# EAGLE board board with button (1) (EAGLE 8.2.2)

Size 29.19 x 33.96 mm. Coordinates in mm from the lower left corner, seen from the top.
Outline: 0,0 29.19,0 29.19,33.96 0,33.96 0,0
Copper layers (1*16): Top 0.035mm / dielectric 1.5mm / Bottom 0.035mm
Design rules "default": minimum track width 10mil, minimum drill 24mil, track to track 8mil, track to pad 8mil, pad to pad 8mil, via to via 8mil, smd to smd 8mil, copper to edge 40mil, drill to drill 8mil, minimum pad ring 10mil, minimum via ring 8mil, stop-mask expansion 4mil, vias tented up to drill 0mil, thermal gap 10mil

## Footprints (pad centres in the part's own frame; a part is rotated, then mirrored left to right if it is on the bottom)
C1206FAB = smd 1.27 x 1.905: 1 -1.651,0; 2 1.651,0
SOIC14 = smd 0.61 x 2.21: 1 -3.81,-2.603; 2 -2.54,-2.603; 3 -1.27,-2.603; 4 0,-2.603; 5 1.27,-2.603; 6 2.54,-2.603; 7 3.81,-2.603; 8 3.81,2.603; 9 2.54,2.603; 10 1.27,2.603; 11 0,2.603; 12 -1.27,2.603; 13 -2.54,2.603; 14 -3.81,2.603
LED1206FAB = smd 1.27 x 1.905: 1 -1.651,0; 2 1.651,0
R1206FAB = smd 1.27 x 1.905: 1 -1.651,0; 2 1.651,0
6MM_SWITCH = smd 2.286 x 1.524: 1 -3.302,2.286; 2 3.302,2.286; 3 -3.302,-2.286; 4 3.302,-2.286
EFOBM = smd 0.8 x 3.9: 1 -1.35,0; 2 0,0; 3 1.35,0
2X03SMD = smd 2.54 x 1.27: 1 -2.54,2.54; 2 2.92,2.54; 3 -2.54,0; 4 2.92,0; 5 -2.54,-2.54; 6 2.92,-2.54
1X06SMD = smd 2.54 x 1.27: 1 0,6.35; 2 0,3.81; 3 0,1.27; 4 0,-1.27; 5 0,-3.81; 6 0,-6.35

## Placement (x,y rotation side)
C1  1 uf  [C1206FAB]  15.24,30.48 0 top
IC1  ATTINY44-SSU  [SOIC14]  12.7,21.59 270 top
LED1  LEDFAB1206  [LED1206FAB]  3.81,11.43 0 top
R1  10k  [R1206FAB]  10.16,30.48 180 top
R2  498  [R1206FAB]  3.81,17.78 0 top
S1  [6MM_SWITCH]  22.86,12.7 0 top
U$1  RESONATOR  [EFOBM]  3.81,24.13 270 top
U$2  AVRISPSMD  [2X03SMD]  12.7,11.43 270 top
U$3  FTDI-SMD-HEADER  [1X06SMD]  26.67,24.13 0 top

## Library data of the parts
C1 IC1 LED1 R1 R2 S1 U$1-U$3 = fab

## Nets
BUTTON: IC1.10 S1.1
CTS: U$3.2
GND: C1.2 IC1.14 LED1.2 S1.3 U$1.2 U$2.6 U$3.1
LED: IC1.6 R2.2
MISO: IC1.8 U$2.1
MOSI: IC1.7 U$2.4
N$1: IC1.2 U$1.1
N$2: LED1.1 R2.1
N$4: IC1.3 U$1.3
RST: IC1.4 R1.1 U$2.5
RTS: U$3.6
RX: IC1.12 U$3.5
SCK: IC1.9 U$2.3
TX: IC1.13 U$3.4
VCC: C1.1 IC1.1 R1.2 U$2.2 U$3.3

## Tracks (layer width: path | path; a pad name or v marks a point on that pad's centre or on a via)
BUTTON  (1 unrouted)
GND  (6 unrouted)
LED  (1 unrouted)
MISO  (1 unrouted)
MOSI  (1 unrouted)
N$1  (1 unrouted)
N$2  (1 unrouted)
N$4  (1 unrouted)
RST  (2 unrouted)
RX  (1 unrouted)
SCK  (1 unrouted)
TX  (1 unrouted)
VCC  (4 unrouted)